# Altium PCB pcb_show_voltage_improved.PcbDoc
Units mm, origin at the board's own origin, x right, y up, seen from the top; angles counter-clockwise.
Board outline 68 x 42.5 mm, 3 copper layers (Top Layer, Ground Plane, Bottom Layer), stack 0.488 mm thick; 15 components, 45 nets, 66 pads, 0 vias.
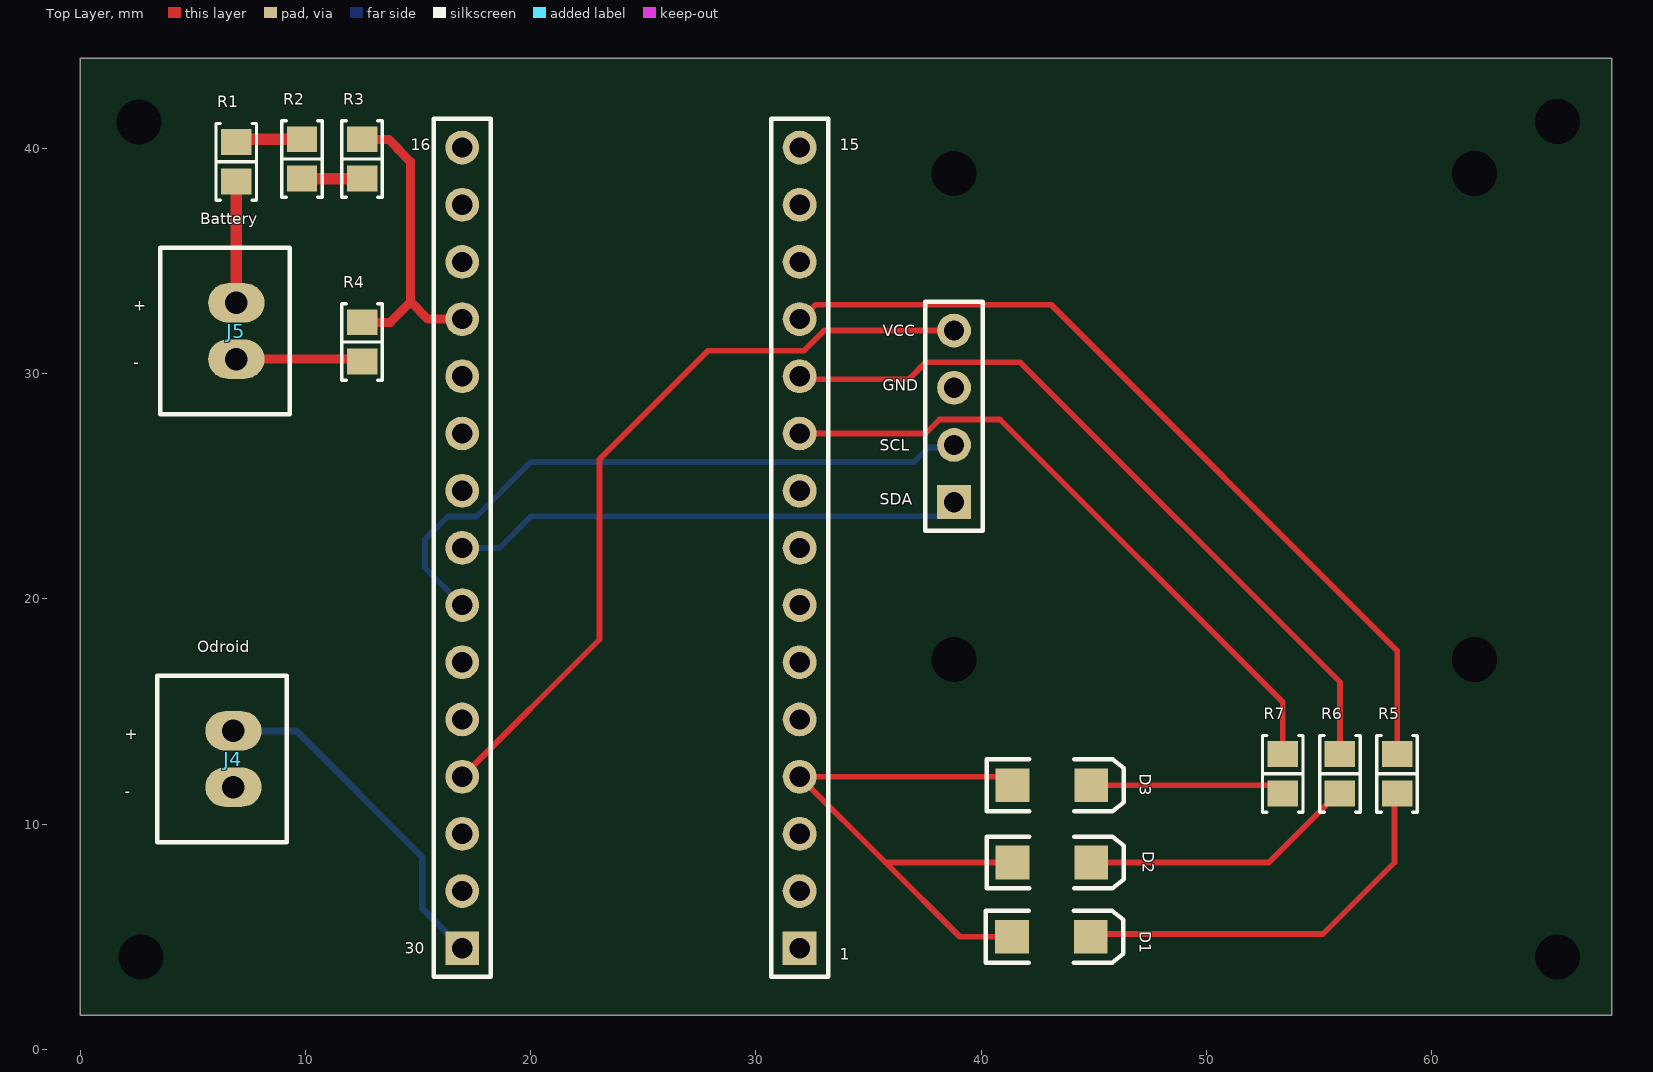
[diagram p0: Top Layer view]
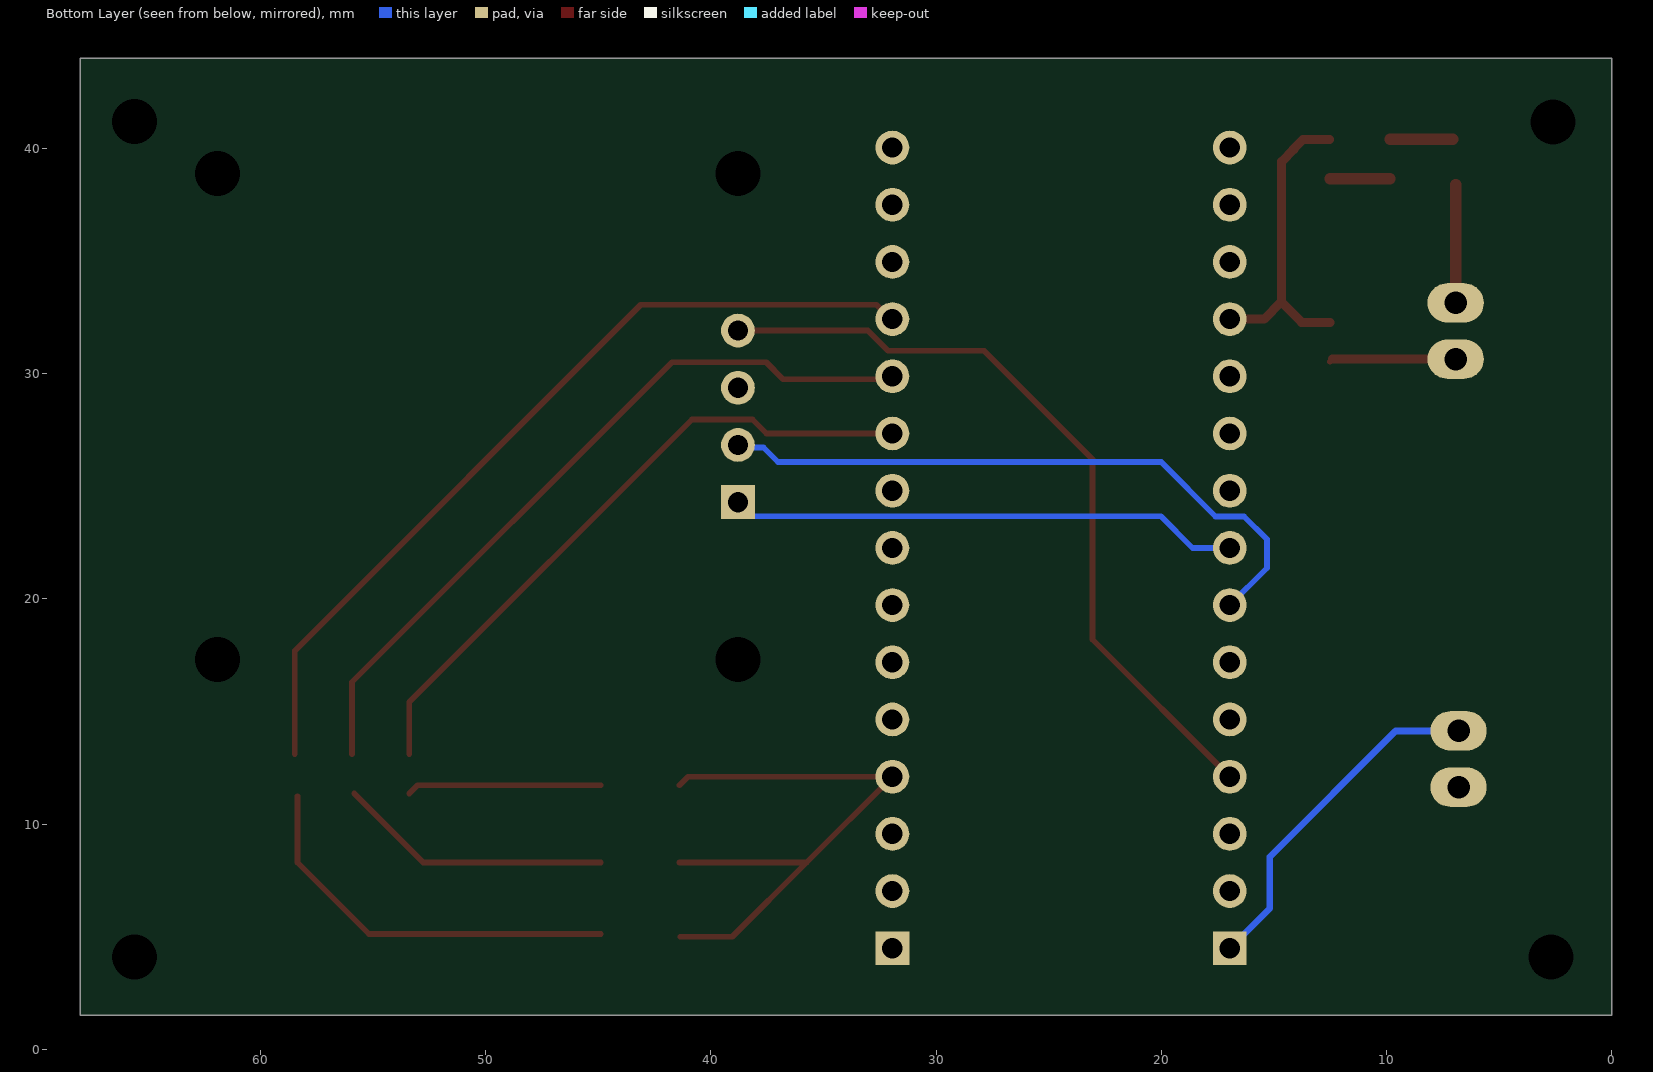
[diagram p1: Bottom Layer view, seen from below]
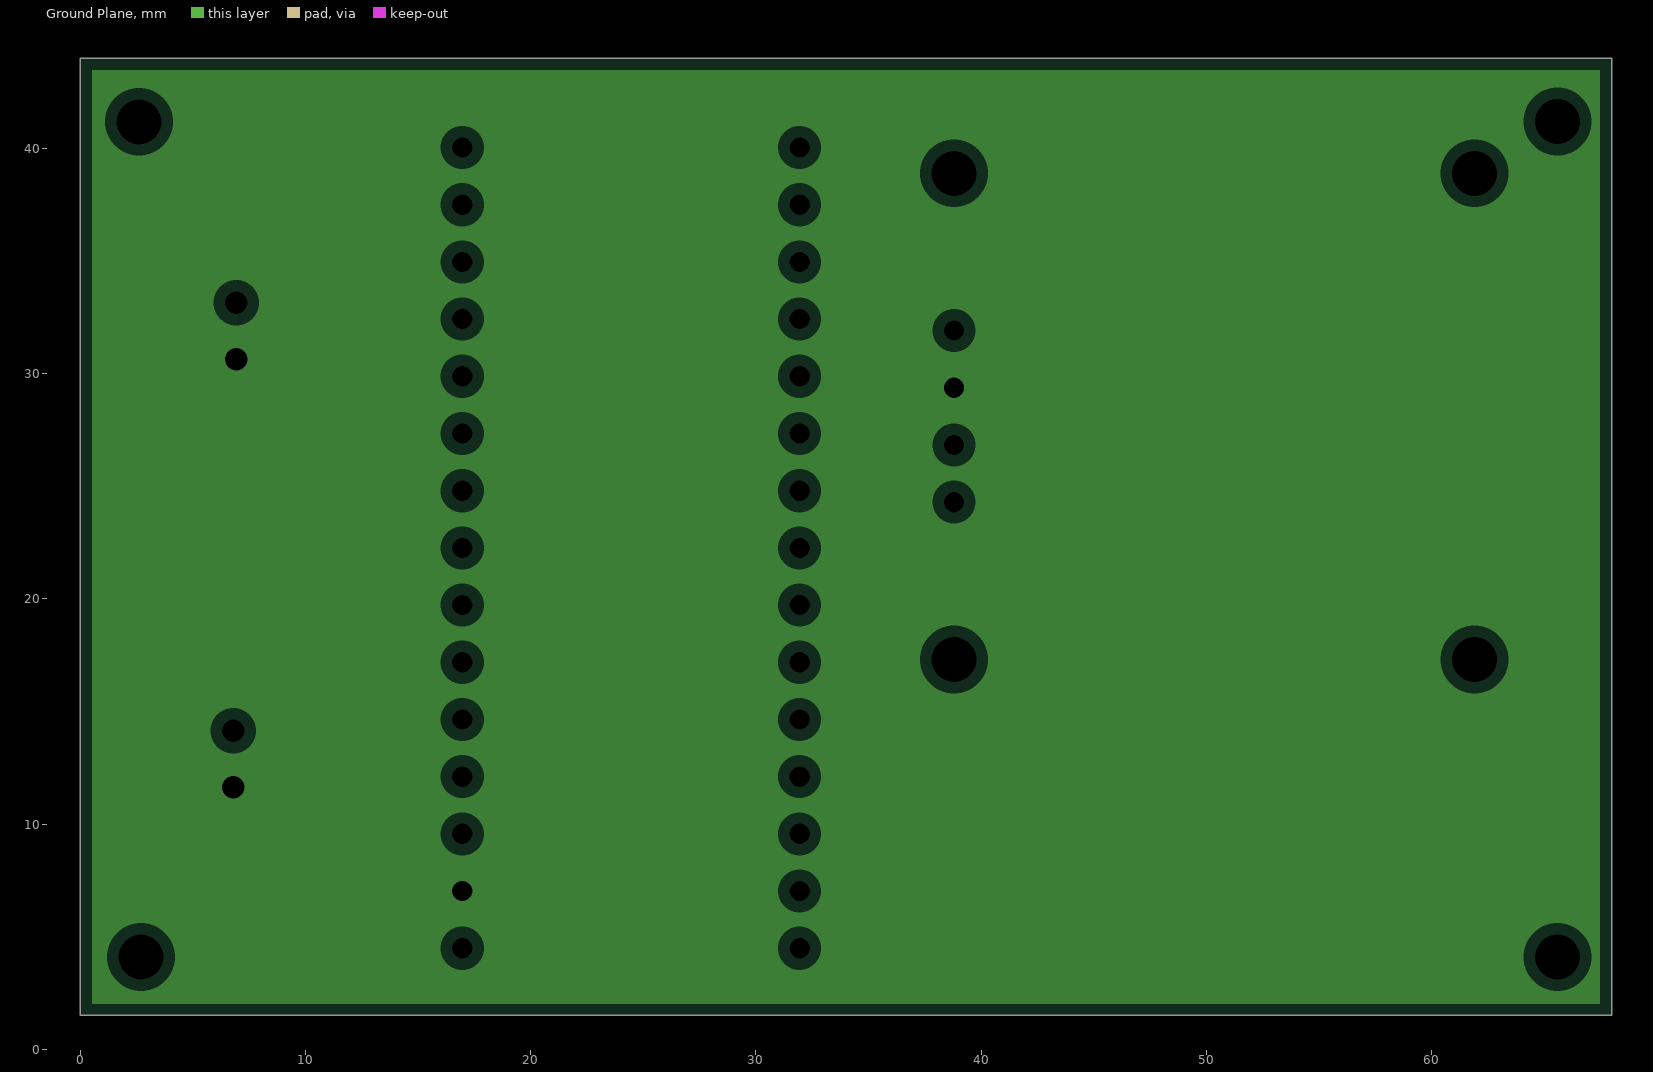
[diagram p2: Ground Plane, clearances drawn from the general rule]
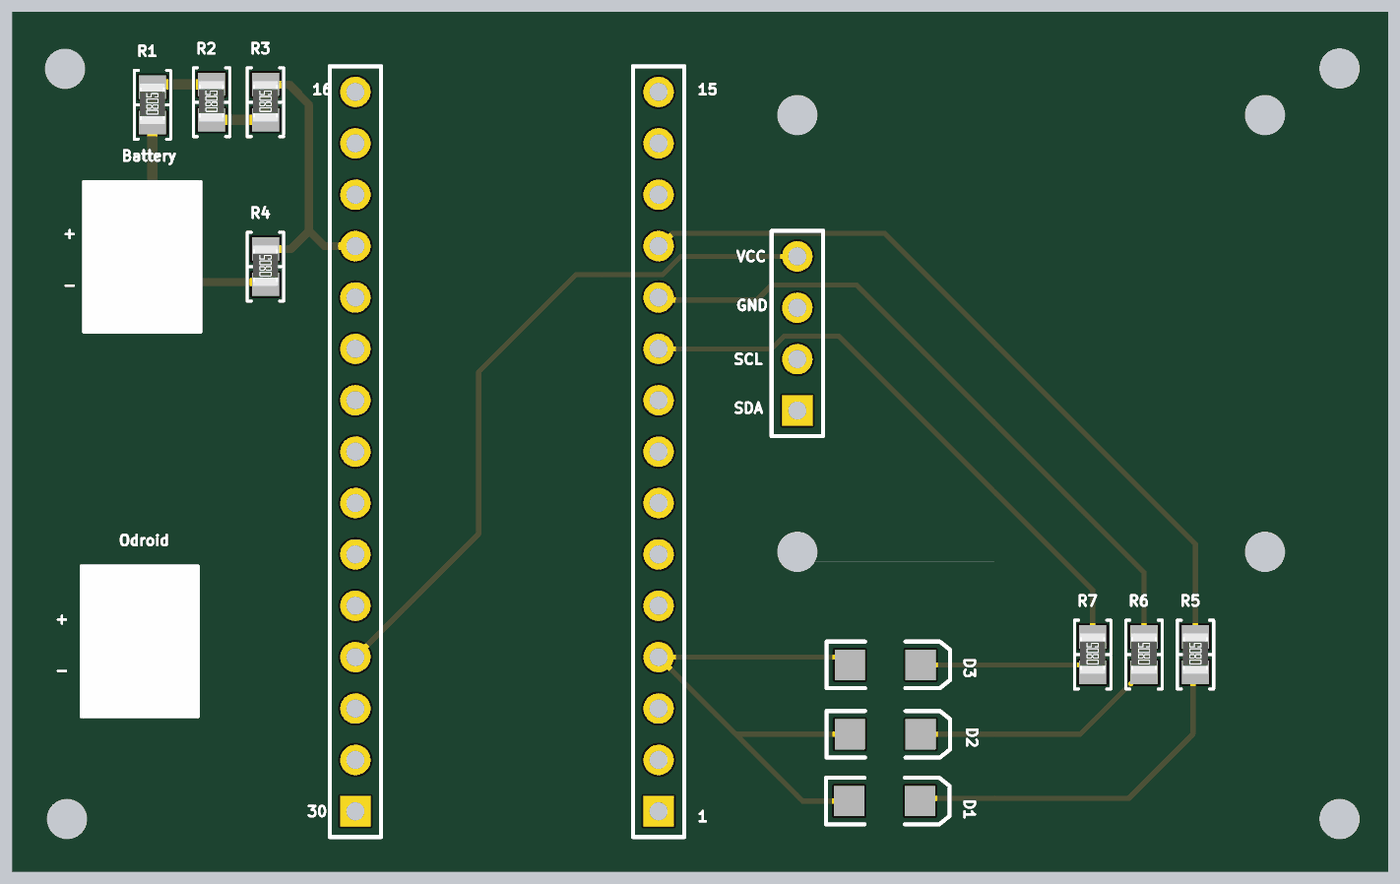
[diagram p3: 3D render of the assembled board from above, using the file's embedded part models]

## Layer stack, top to bottom
Top Solder: solder mask 0.0102, Solder Resist, Dk 3.5
Top Layer: signal copper 0.0356
Dielectric 1: core 0.254, FR-4, Dk 4.2
Ground Plane: plane copper 0.036, net GND
Dielectric 2: prepreg 0.127, Dk 4.2
Bottom Layer: signal copper 0.0356
Bottom Solder: solder mask 0.0102, Solder Resist, Dk 3.5

## Board outline
0,44 68,44 68,1.5 0,1.5

## Design rules (kind name [scope] priority, off if disabled: settings)
Clearance [All] p1: gap=0.254 ignorepadtopadclearanceinfootprint=FALSE except(0: Arc-Hole Track-Hole SMDPad-Hole THPad-Hole Via-Hole Fill-Hole Poly-Hole Region-Hole Text-Hole; 0.1: SMDPad-SMDPad)
PlaneClearance [All] p1: clearance=0.508
PlaneConnect [All] p1: planeconnectstyle=Relief reliefexpansion=0.508 reliefentries=4 reliefconductorwidth=0.254 reliefairgap=0.254
PolygonConnect [All] p1: connectstyle=Relief reliefconductorwidth=0.254 reliefentries=4 polygonreliefangle="90 Angle" airgapwidth=0.254
RoutingVias [All] p1: holewidth=0.711 width=1.27 viastyle="Through Hole" minholewidth=0.711 minwidth=1.27 maxholewidth=0.711 maxwidth=1.27
SolderMaskExpansion [All] p1: expansion=0.102
Width [All] p1: maxlimit=0.5 minlimit=0.1 preferedwidth=0.254 minimp=50.000000 maximp=50.000000 favimp=50.000000
28 further rules are at their usual default settings.

## Components (designator, comment, footprint, x,y, rotation, side; value= is the part's Value field where it differs from the comment)
D2 "LED_YELLOW" 3.2X1.6X1.1 43.145,8.292 r0 top
D3 "LED_GREEN" 3.2X1.6X1.1 43.145,11.721 r0 top
J4 "Odroid" "JST XH B2B-XH-A" 6.795,12.884 r270 top
J5 "Battery" "JST XH B2B-XH-A" 6.922,31.894 r270 top
R1 "100k" "RES 0805/2012" 6.922,39.407 r90 top (schematic designator R25)
R2 "100k" "RES 0805/2012" 9.843,39.534 r90 top (schematic designator R25)
R3 "100k" "RES 0805/2012" 12.51,39.534 r90 top
R4 "100k" "RES 0805/2012" 12.51,31.406 r90 top
R5 "100k" "RES 0805/2012" 58.476,12.229 r90 top
R6 "100k" "RES 0805/2012" 55.936,12.229 r90 top
R7 "100k" "RES 0805/2012" 53.396,12.229 r90 top
VCC "Header 4" HDR1X4 38.799,24.294 r90 top (schematic designator P3)
? "LED_RED" 3.2X1.6X1.1 43.117,4.99 r0 top
? "Header 15" HDR1X15 31.941,4.482 r90 top
? "Header 15" HDR1X15 16.955,4.482 r90 top

## Footprints (in the part's own frame and the unit in brackets; to place one, negate y for a bottom-side part, rotate by r counter-clockwise, add the part's x,y. Pads: shape width x height; smd on the part's side, far side on the other; paste and mask are expansions set on the pad)
3.2X1.6X1.1 [mm] "SMT LED; 2 Flat Leads"
  rect 1.5x1.5 smd: 1(-1.75,0) 2(1.75,0)
  silkscreen extent -2.9,-1.15 3.2,1.15
HDR1X4 [mm] "Connector; Header; 4 Position"
  rect 1.5x1.5 hole 0.9: 1(0,0)
  round 1.5 hole 0.9: 2(2.54,0) 3(5.08,0) 4(7.62,0)
  silkscreen extent -1.27,-1.27 8.89,1.27
HDR1X15 [mm] "Connector; Header; 15 Position"
  rect 1.5x1.5 hole 0.9: 1(0,0)
  round 1.5 hole 0.9: 2(2.54,0) 3(5.08,0) 4(7.62,0) 5(10.16,0) 6(12.7,0) 7(15.24,0) 8(17.78,0) 9(20.32,0) 10(22.86,0) 11(25.4,0) 12(27.94,0) 13(30.48,0) 14(33.02,0) 15(35.56,0)
  silkscreen extent -1.27,-1.27 36.83,1.27
"JST XH B2B-XH-A" [mm]
  oval 1.75x2.5 hole 1: 1(-1.25,0) 2(1.25,0)
  silkscreen extent -3.7,-3.38 3.7,2.38, body extent -3.7,-3.38 3.7,2.38, height 7
"RES 0805/2012" [mm] "Chip Resistor, 2-Leads, Body 2.00x1.25mm, IPC Medium Density"
  rect 1.15x1.35 smd: 1(-0.875,0) 2(0.875,0)
  silkscreen extent -1.7,-0.9 1.7,0.9, body extent -0.95,-0.62 1.05,0.63, height 0.6

## Part data
D2: library part LED2, "GREEN", LatestRevisionDate=17-Jul-2002, LatestRevisionNote="Re-released for DXP Platform.", PackageDescription="SM LED; 2 Flat Leads", PackageReference=3.2X1.6X1.1, PackageVersion=Feb-2002, Published=8-Jun-2000, Publisher="Altium Limited"
D3: library part LED2, "YELLOW", LatestRevisionDate=17-Jul-2002, LatestRevisionNote="Re-released for DXP Platform.", PackageDescription="SM LED; 2 Flat Leads", PackageReference=3.2X1.6X1.1, PackageVersion=Feb-2002, Published=8-Jun-2000, Publisher="Altium Limited"
J4 J5: library part B2B-XH-A(LF)(SN), "CONN HEADER XH TOP 2POS 2.5MM", Colour=Natural, Manufacturer="JST Sales America Inc.", Supplier Part Number 1=455-2247-ND, ComponentLink1Description=Datasheet, ComponentLink1URL=http://www.jst-mfg.com/product/pdf/eng/eXH.pdf, ComponentLink2Description="Digi-Key Listing", ComponentLink2URL=http://www.digikey.com/product-detail/en/jst-sales-america-inc/B2B-XH-A(LF)(SN)/455-2247-ND/1651045, Contact Finish=Tin, Fastening Type="Detent Lock", Number Of Positions=2, Number Of Rows=1, PartId=16449, Part Number=B2B-XH-A(LF)(SN), Pitch="0.098\" (2.50mm)", Price=0,15, Series=XH, Supplier 1=Digi-Key, Type="Header, Shrouded"
R1 R2 R3 R4 R5 R6 R7: library part ERJ-6GEYJ104V, "RES SMD 100K OHM 5% 1/8W 0805", Device Package="0805 (2012 Metric)", Manufacturer="Panasonic Electronic Components", PowerRating="0.125W, 1/8W", Supplier Part Number 1=P100KATR-ND, TemperatureCoefficient=200ppm/C, TemperatureRange="-55C ~ 155C", Tolerance=5%, ComponentLink1Description=Datasheet, ComponentLink1URL=http://industrial.panasonic.com/www-cgi/jvcr13pz.cgi?E+PZ+3+AOA0001+ERJ6GEYJ104V+7+WW, ComponentLink2Description="Digi-Key Listing", ComponentLink2URL=https://www.digikey.com/product-detail/en/panasonic-electronic-components/ERJ-6GEYJ104V/P100KATR-ND/83110, PartId=11445, Part Number=ERJ-6GEYJ104V, Price=0,0032, Supplier 1=Digi-Key
VCC: "Header, 4-Pin", LatestRevisionDate=17-Jul-2002, LatestRevisionNote="Re-released for DXP Platform.", Publisher="Altium Limited"
?: library part LED2, "RED", LatestRevisionDate=17-Jul-2002, LatestRevisionNote="Re-released for DXP Platform.", PackageDescription="SM LED; 2 Flat Leads", PackageReference=3.2X1.6X1.1, PackageVersion=Feb-2002, Published=8-Jun-2000, Publisher="Altium Limited"
? ?: "Header, 15-Pin", LatestRevisionDate=17-Jul-2002, LatestRevisionNote="Re-released for DXP Platform.", Publisher="Altium Limited"

## Free pads (board coordinates)
  round 0 hole 2 unplated: 3(2.604,41.185) 3(2.7,4.1) 3(38.799,17.309) 3(38.799,38.899) 3(61.913,17.309) 3(61.913,38.899) 3(65.6,4.1) 3(65.6,41.2)

## Nets (pads, with @x,y where several pads share a name; then routed paths per layer and width w, separated by ;. In a path a pad name is that pad's centre, name@x,y a point inside that pad or via, vN(x,y) a via of type N, cw(c..) or ccw(c..) an arc to the next point about the centre after c; other vN are vias at no path point)
+3,3VDC: 
+12VDC: J5.1 R1.1 | length 5.3
  Top Layer w0.5: J5.1 R1.1@6.922,38.405
-12VDC: 
GND: ?.2@16.955,7.022 J4.2 J5.2 R4.1 VCC.3 | length 6
  Top Layer w0.254: J4.2 J4.2@7.17,11.634 ; R4.1@12.397,30.644 R4.1
  Top Layer w0.4: J5.2 R4.1@12.397,30.644
NetC1_1: R1.2 R2.2 | length 2.8
  Top Layer w0.5: R1.2@7.049,40.409 R2.2
NetC1_2: R2.1 R3.1 | length 2.7
  Top Layer w0.5: R2.1 R3.1
NetC4_2: ?.12@16.955,32.422 R3.2 R4.2 | length 13.9
  Top Layer w0.4: R4.2 13.766,32.281 14.669,33.184 15.431,32.422 ?.12@16.955,32.422 ; R3.2@12.519,40.4 13.7,40.4 14.139,39.961 ; 14.115,39.961 14.655,39.421 14.655,33.198
NetC5_1: 
NetC5_2: 
NetC9_1: 
NetC13_1: D3.2 R7.1 | length 8.7
  Top Layer w0.254: D3.2 53.029,11.721 R7.1
NetC13_2: D2.2 R6.1 | length 12.2
  Top Layer w0.254: D2.2 52.774,8.292 R6.1@55.836,11.354
NetC14_1: ?.2@44.867,4.99 R5.1 | length 17.7
  Top Layer w0.254: ?.2@44.895,5.117 55.182,5.117 58.357,8.292 R5.1@58.357,11.235
NetC14_2: 
NetD3_1: ?.1@41.367,4.99 ?.4@31.941,12.102 D2.1 D3.1 | length 27.6
  Top Layer w0.254: ?.1@41.367,4.99 39.053,4.99 35.751,8.292 ; D2.1 35.751,8.292 ; D3.1 41.014,12.102 31.941,12.102 35.751,8.292
NetD6_1: 
NetIC1_1: 
NetIC1_2: 
NetIC1_3: 
NetIC1_4: 
NetIC1_6: 
NetIC1_10: 
NetIC1_13: 
NetIC1_14: 
NetIC1_15: 
NetIC1_16: 
NetIC2_1: 
NetIC2_2: 
NetIC2_3: 
NetIC2_4: 
NetIC2_6: 
NetIC2_10: 
NetIC2_13: 
NetIC2_14: 
NetIC2_15: 
NetIC2_16: 
NetOP1_2: ?.12@31.941,32.422 R5.2 | length 37.9
  Top Layer w0.254: ?.12@31.889,32.295 32.651,33.057 43.117,33.057 58.476,17.698 R5.2
NetOP1_6: ?.11@31.941,29.882 R6.2 | length 33.5
  Top Layer w0.254: ?.11@31.814,29.755 36.795,29.755 37.545,30.505 41.732,30.505 55.936,16.301 R6.2
NetOP1_9: ?.10@31.941,27.342 R7.2 | length 29.2
  Top Layer w0.254: ?.10@31.941,27.342 37.529,27.342 38.152,27.965 40.843,27.965 53.396,15.412 R7.2
NetOP1_13: 
NetP1_2: ?.4@16.955,12.102 VCC.4 | length 34.7
  Top Layer w0.254: ?.4@16.955,12.102 23.051,18.198 23.051,26.199 27.865,31.013 32.131,31.013 33.032,31.914 VCC.4
NetP3_2: ?.7@16.955,19.722 VCC.2 | length 28.7
  Bottom Layer w0.254: ?.7@16.955,19.722 15.304,21.373 15.304,22.643 16.32,23.659 17.59,23.659 20.003,26.072 37.021,26.072 37.668,26.719 VCC.2@38.684,26.719
NetP4_2: ?.8@16.955,22.262 VCC.1 | length 22.7
  Bottom Layer w0.254: ?.8@16.955,22.262 18.606,22.262 20.015,23.671 38.176,23.671 VCC.1
NetP9_2: 
Vbat+: 
pads on no net: ?.1@16.955,4.482 ?.1@31.941,4.482 ?.2@31.941,7.022 ?.3 ?.5 ?.6 ?.7@31.941,19.722 ?.8@31.941,22.262 ?.9 ?.10@16.955,27.342 ?.11@16.955,29.882 ?.13 ?.14 ?.15 J4.1
copper on no net: | length 15.5
  Bottom Layer w0.3: 6.795,14.134 9.589,14.134 15.177,8.546 15.177,6.26 16.955,4.482

## Polygon pours and split planes (outlines as drawn)
GND on Ground Plane (split plane): 67.49,2.01 0.51,2.01 0.51,43.49 67.49,43.49

## Silkscreen, mask and mechanical layers (free items; w line width, h text height)
Top Overlay:
  text "16" at 14.669,39.915 h0.51
  text "15" at 33.719,39.915 h0.51
  text "+" at 2.35,32.803 h0.51
  text "-" at 2.35,30.263 h0.51
  text "GND" at 35.624,29.247 h0.51
  text "SCL" at 35.497,26.58 h0.51
  text "SDA" at 35.497,24.167 h0.51
  text "+" at 1.969,13.753 h0.51
  text "-" at 1.969,11.213 h0.51
  text "D1" at 47.054,5.244 h0.51 r270
  text "30" at 14.415,4.228 h0.51
  text "1" at 33.719,3.974 h0.51